# Altium PCB PCB_Alpha.PcbDoc (part 1 of 2)
Units mm, origin at the board's own origin, x right, y up, seen from the top; angles counter-clockwise.
Board outline 114.3 x 137.16 mm, 2 copper layers (Top Layer, Bottom Layer); 181 components, 118 nets, 600 pads, 750 vias.
Unrouted connection lines stored in the file: 4.
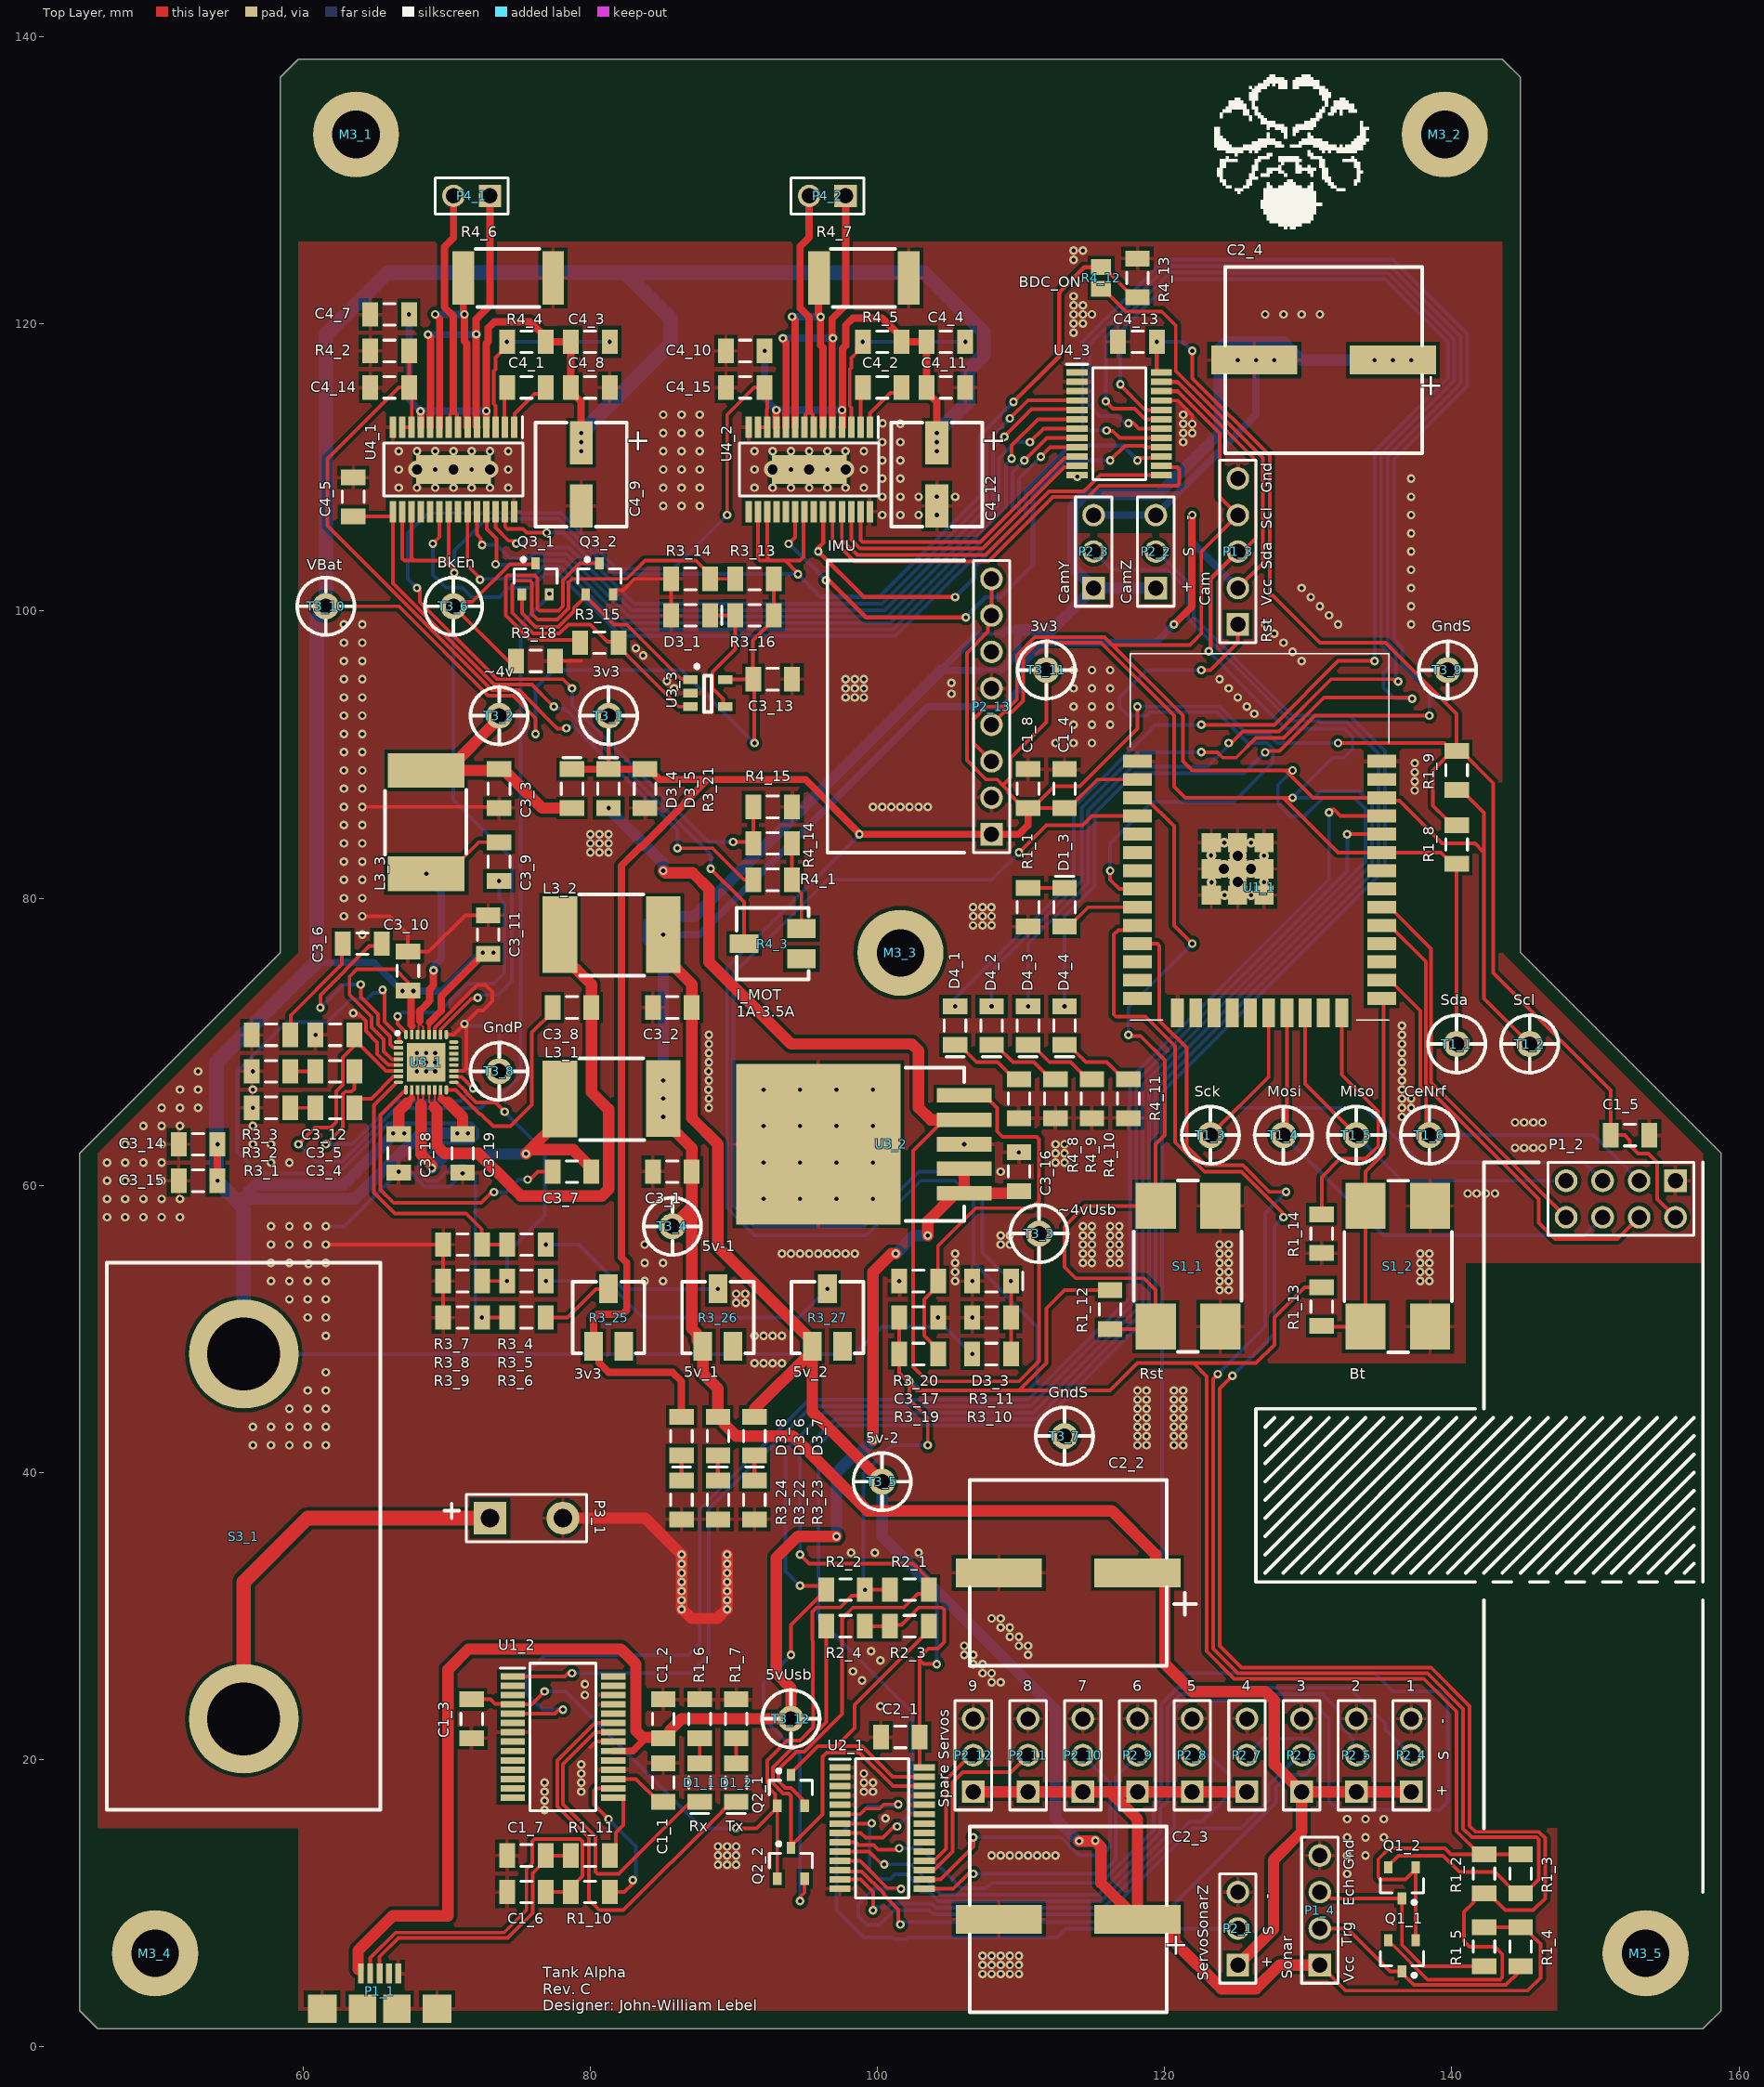
[diagram p0: Top Layer view]
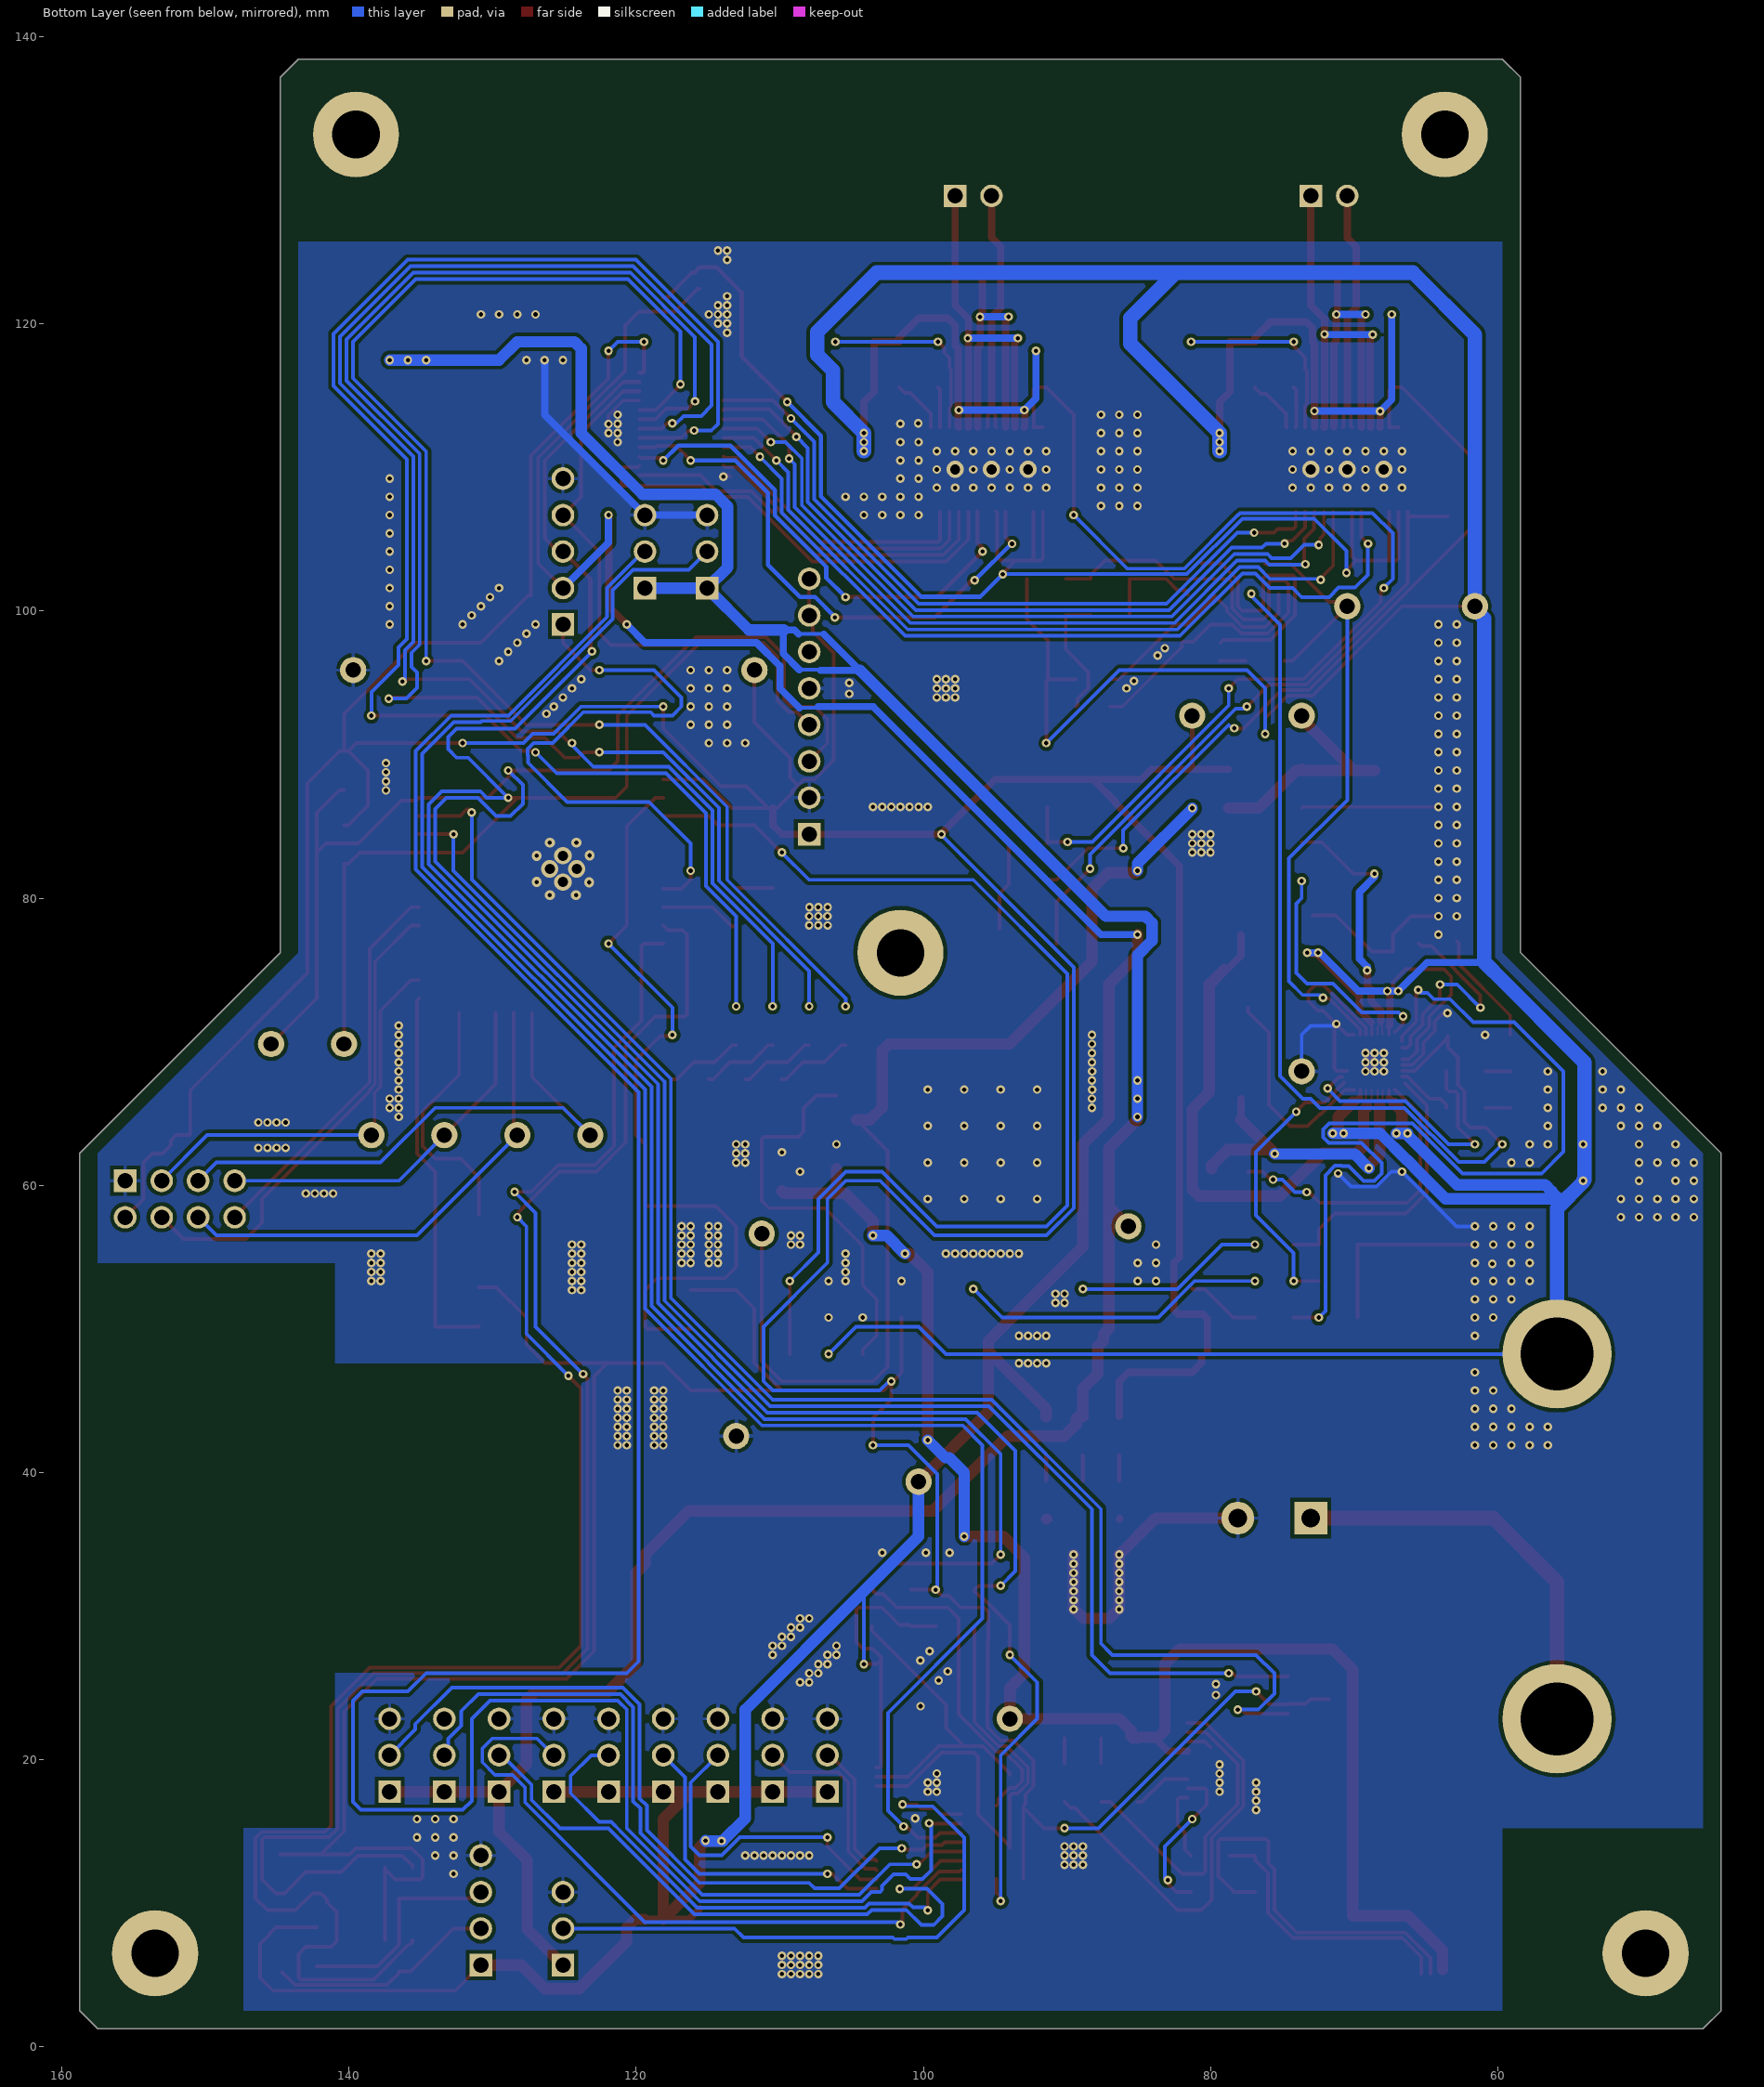
[diagram p1: Bottom Layer view, seen from below]

## Layer stack, top to bottom
Top Solder: solder mask 0.0102, Solder Resist, Dk 3.5
Top Layer: signal copper 0.0356
Dielectric 1: dielectric 0.32, FR-4, Dk 4.8
Bottom Layer: signal copper 0.0356
Bottom Solder: solder mask 0.0102, Solder Resist, Dk 3.5

## Board outline
44.45,2.54 44.45,3.81 44.45,62.23 58.42,76.2 58.42,137.16 59.69,138.43 143.51,138.43 144.78,137.16 144.78,76.2 158.75,62.23 158.75,2.54 157.48,1.27 45.72,1.27

## Design rules (kind name [scope] priority, off if disabled: settings)
Clearance [All] p1: gap=0.254 ignorepadtopadclearanceinfootprint=FALSE except(0: Arc-Hole Track-Hole SMDPad-Via SMDPad-Hole THPad-Hole Via-Hole Fill-Hole Poly-Hole Region-Hole Text-Hole; 0.127: Arc-Arc Arc-Track Arc-SMDPad Arc-Via Track-Track Track-SMDPad Track-Via SMDPad-SMDPad)
HoleSize [All] p1: absolutevalues=TRUE maxlimit=5.08 minlimit=0.025 maxpercent=80.000 minpercent=20.000
MinimumSolderMaskSliver [All] p1: minsoldermaskwidth=0
PlaneConnect [All] p1: pad.planeconnectstyle=Relief pad.reliefexpansion=0.508 pad.reliefentries=4 pad.reliefconductorwidth=0.254 pad.reliefairgap=0.254 via.planeconnectstyle=Direct via.reliefexpansion=0.508 via.reliefentries=4 via.reliefconductorwidth=0.254 via.reliefairgap=0.254
PolygonConnect [All] p1: thpad.connectstyle=Relief thpad.reliefconductorwidth=0.254 thpad.reliefentries=4 thpad.polygonreliefangle="90 Angle" thpad.airgapwidth=0.254 smdpad.connectstyle=Relief smdpad.reliefconductorwidth=0.254 smdpad.reliefentries=4 smdpad.polygonreliefangle="90 Angle" smdpad.airgapwidth=0.254 via.connectstyle=Direct via.reliefconductorwidth=0.254 via.reliefentries=4 via.polygonreliefangle="90 Angle" via.airgapwidth=0.254
RoutingVias [All] p1: holewidth=0.711 width=1.27 viastyle="Through Hole" minholewidth=0.203 minwidth=0.406 maxholewidth=0.711 maxwidth=1.27
SolderMaskExpansion [All] p1: expansion=0.102 istentingtop=FALSE
Width [All] p1: maxlimit=1.016 minlimit=0.127 preferedwidth=0.254 minimp=50.000000 maximp=50.000000 favimp=50.000000
27 further rules are at their usual default settings.

## Classes and differential pairs
component class servo_driver_and_imu_device: C2_1 C2_2 C2_3 C2_4 P2_1 P2_2 P2_3 P2_4 P2_5 P2_6 P2_7 P2_8 P2_9 P2_10 P2_11 P2_12 P2_13 Q2_1 Q2_2 R2_1 R2_2 R2_3 R2_4 U2_1
component class power_supply_and_battery_management: C3_1 C3_2 C3_3 C3_4 C3_5 C3_6 C3_7 C3_8 C3_9 C3_10 C3_11 C3_12 C3_13 C3_14 C3_15 C3_16 C3_17 C3_18 C3_19 D3_1 D3_3 D3_4 D3_5 D3_6 D3_7 D3_8 L3_1 L3_2 L3_3 M3_1 M3_2 M3_3 M3_4 M3_5 P3_1 Q3_1 Q3_2 R3_1 R3_2 R3_3 R3_4 R3_5 R3_6 R3_7 R3_8 R3_9 R3_10 R3_11 R3_13 R3_14 R3_15 R3_16 R3_18 R3_19 R3_20 R3_21 R3_22 R3_23 R3_24 R3_25 R3_26 R3_27 S3_1 T3_1 T3_2 T3_3 T3_4 T3_5 T3_6 T3_7 T3_8 T3_9 T3_10 T3_11 T3_12 U3_1 U3_2 U3_3
component class main_control: C1_1 C1_2 C1_3 C1_4 C1_5 C1_6 C1_7 C1_8 D1_1 D1_2 D1_3 P1_1 P1_2 P1_3 P1_4 Q1_1 Q1_2 R1_1 R1_2 R1_3 R1_4 R1_5 R1_6 R1_7 R1_8 R1_9 R1_10 R1_11 R1_12 R1_13 R1_14 S1_1 S1_2 T1_1 T1_2 T1_3 T1_4 T1_5 T1_6 U1_1 U1_2
component class brushed_motor_drivers: C4_1 C4_2 C4_3 C4_4 C4_5 C4_7 C4_8 C4_9 C4_10 C4_11 C4_12 C4_13 C4_14 C4_15 D4_1 D4_2 D4_3 D4_4 P4_1 P4_2 R4_1 R4_2 R4_3 R4_4 R4_5 R4_6 R4_7 R4_8 R4_9 R4_10 R4_11 R4_12 R4_13 R4_14 R4_15 U4_1 U4_2 U4_3

## Components (designator, comment, footprint, x,y, rotation, side; value= is the part's Value field where it differs from the comment)
C1_1 "12063C104MAT2A" C1206 85.09,18.415 r90 top value=100nF
C1_2 "C1206C103M5RACTU" C1206 85.09,22.86 r90 top value=10nF
C1_3 "12063C104MAT2A" C1206 71.755,22.86 r270 top value=100nF
C1_4 "12063C104MAT2A" C1206 113.03,87.63 r90 top value=100nF
C1_5 "EMK316BJ106MLHT" C1206 152.4,63.5 r0 top value=10µF
C1_6 "CML1206C0G470JT50V" C1206 75.565,10.795 r0 top value=47pF
C1_7 "CML1206C0G470JT50V" C1206 75.565,13.335 r180 top value=47pF
C1_8 "CL31A226KOHNNNE" C1206 110.49,87.63 r90 top value=22µF
C2_1 "12063C104MAT2A" C1206 101.6,21.59 r180 top value=100nF
C2_2 "EMHS250GRA102MKE0S" CAP-ELECTRO-KE0 118.745,33.02 r180 top value=1000µF
C2_3 "EMHS250GRA102MKE0S" CAP-ELECTRO-KE0 118.745,8.89 r180 top value=1000µF
C2_4 "EMHS250GRA102MKE0S" CAP-ELECTRO-KE0 136.525,117.475 r180 top value=1000µF
C3_1 "CL31A226KOHNNNE" C1206 85.725,60.96 r0 top value=22µF
C3_2 "CL31A226KOHNNNE" C1206 85.725,72.39 r0 top value=22µF
C3_3 "CL31A226KOHNNNE" C1206 73.66,87.63 r90 top value=22µF
C3_4 "CML1206X7R472KT50V" C1206 62.23,65.405 r180 top value=4.7nF
C3_5 "CML1206X7R472KT50V" C1206 62.23,67.945 r180 top value=4.7nF
C3_6 "CML1206X7R472KT50V" C1206 64.135,76.835 r0 top value=4.7nF
C3_7 "885012208085" C1206 78.74,60.96 r0 top value=47nF
C3_8 "885012208085" C1206 78.74,72.39 r0 top value=47nF
C3_9 "885012208085" C1206 73.66,82.55 r270 top value=47nF
C3_10 "CM316X5R475K25AT" C1206 67.31,74.93 r270 top value=4.7µF
C3_11 "CM316X5R475K25AT" C1206 72.898,77.47 r270 top value=4.7µF
C3_12 "885382208005" C1206 62.23,70.485 r0 top value=1µF
C3_13 "12063C104MAT2A" C1206 92.71,95.25 r180 top value=100nF
C3_14 "EMK316BJ106MLHT" C1206 52.705,62.865 r0 top value=10µF
C3_15 "12063C104MAT2A" C1206 52.705,60.325 r0 top value=100nF
C3_16 "885382208005" C1206 109.855,60.96 r270 top value=1µF
C3_17 "EMK316BBJ476ML-T" C1206 102.87,50.8 r180 top value="47µF (Ceram.)"
C3_18 "CM316X5R475K25AT" C1206 66.675,62.23 r90 top value=4.7µF
C3_19 "CM316X5R475K25AT" C1206 71.12,62.23 r90 top value=4.7µF
C4_1 "C1206C103M5RACTU" C1206 75.565,115.57 r180 top value=10nF
C4_2 "C1206C103M5RACTU" C1206 100.33,115.57 r180 top value=100nF
C4_3 "12063C104MAT2A" C1206 80.01,118.745 r0 top value=100nF
C4_4 "12063C104MAT2A" C1206 104.775,118.745 r0 top value=100nF
C4_5 "C1206C474M5RECAUTO" C1206 63.5,107.95 r90 top value=470nF
C4_7 "12063C104MAT2A" C1206 66.04,120.65 r180 top value=100nF
C4_8 "12063C104MAT2A" C1206 80.01,115.57 r0 top value=100nF
C4_9 "107AXZ016MQ5" CAP-ELECTRO-530530 79.375,111.715 r270 top value=100µF
C4_10 "12063C104MAT2A" C1206 90.805,118.11 r180 top value=100nF
C4_11 "12063C104MAT2A" C1206 104.775,115.57 r0 top value=100nF
C4_12 "107AXZ016MQ5" CAP-ELECTRO-530530 104.14,111.715 r270 top value=100µF
C4_13 "12063C104MAT2A" C1206 118.11,118.745 r180 top value=100nF
C4_14 "C1206C103M5RACTU" C1206 66.04,115.57 r180 top value=10nF
C4_15 "C1206C103M5RACTU" C1206 90.805,115.57 r180 top value=10nF
D1_1 "LTST-C230KRKT" C1206-POLARIZED 87.63,18.415 r270 top
D1_2 "LTST-C230KRKT" C1206-POLARIZED 90.17,18.415 r270 top
D1_3 "APT3216QBC/D" C1206-POLARIZED 113.03,79.375 r90 top
D3_1 "CZRF52C3V3" C1206-POLARIZED 86.995,99.695 r0 top
D3_3 "CZRF52C3V3" C1206-POLARIZED 107.95,53.34 r0 top
D3_4 "ACDBN160-HF" C1206-POLARIZED 78.74,87.63 r90 top
D3_5 "ACDBN160-HF" C1206-POLARIZED 81.28,87.63 r90 top
D3_6 "APT3216SGC" C1206-POLARIZED 88.9,42.545 r270 top
D3_7 "APT3216SGC" C1206-POLARIZED 91.44,42.545 r270 top
D3_8 "APT3216SGC" C1206-POLARIZED 86.36,42.545 r270 top
D4_1 "APT3216QBC/D" C1206-POLARIZED 105.41,71.12 r270 top
D4_2 "APT3216QBC/D" C1206-POLARIZED 107.95,71.12 r270 top
D4_3 "APT3216QBC/D" C1206-POLARIZED 110.49,71.12 r270 top
D4_4 "APT3216QBC/D" C1206-POLARIZED 113.03,71.12 r270 top
L3_1 "MPXV1D0830L3R3" mpxv1D0830 77.851,66.04 r0 top value=3.3µH
L3_2 "MPXV1D0830L3R3" mpxv1D0830 77.851,77.47 r0 top value=3.3µH
L3_3 "MPXV1D0830L3R3" mpxv1D0830 68.594,88.942 r270 top value=3.3µH
M3_1 "Mounting Hole" MOUNTING-HOLE-M3 63.697,133.185 r0 top locked
M3_2 "Mounting Hole" MOUNTING-HOLE-M3 139.503,133.185 r0 top locked
M3_3 "Mounting Hole" MOUNTING-HOLE-M3 101.6,76.2 r0 top locked
M3_4 "Mounting Hole" MOUNTING-HOLE-M3 49.708,6.528 r0 top locked
M3_5 "Mounting Hole" MOUNTING-HOLE-M3 153.492,6.528 r0 top locked
P1_1 "USB3085-30-A" USB-MICRO-CONNECTOR 65.342,2.667 r0 top
P1_2 "Nrf24L01" HDR2X4-42 155.575,60.325 r180 top
P1_3 "EspCam" HDR1X5-42 125.095,99.06 r90 top
P1_4 "Sonar" HDR1X4-42 130.81,5.715 r90 top
P2_1 "Header 3" HDR1X3-42 125.095,5.715 r90 top
P2_2 "Header 3" HDR1X3-42 119.38,101.6 r90 top
P2_3 "Header 3" HDR1X3-42 115.062,101.6 r90 top
P2_4 "Header 3" HDR1X3-42 137.16,17.78 r90 top
P2_5 "Header 3" HDR1X3-42 133.35,17.78 r90 top
P2_6 "Header 3" HDR1X3-42 129.54,17.78 r90 top
P2_7 "Header 3" HDR1X3-42 125.73,17.78 r90 top
P2_8 "Header 3" HDR1X3-42 121.92,17.78 r90 top
P2_9 "Header 3" HDR1X3-42 118.11,17.78 r90 top
P2_10 "Header 3" HDR1X3-42 114.3,17.78 r90 top
P2_11 "Header 3" HDR1X3-42 110.49,17.78 r90 top
P2_12 "Header 3" HDR1X3-42 106.68,17.78 r90 top
P2_13 "Bno055 port" HDR1X8-42 107.95,84.455 r90 top
P3_1 "1521860000" HDR1X2-508-POLARIZED 73.025,36.83 r0 top
P4_1 "Left Motor Connector" HDR1X2-42 73.025,128.905 r180 top
P4_2 "Right Motor Connector" HDR1X2-42 97.79,128.905 r180 top
Q1_1 "T2N7002AK,LM" SOT23_L 136.525,6.35 r270 top
Q1_2 "T2N7002AK,LM" SOT23_L 136.525,11.43 r270 top
Q2_1 "T2N7002AK,LM" SOT23_L 93.98,17.875 r90 top
Q2_2 "T2N7002AK,LM" SOT23_L 93.98,12.795 r90 top
Q3_1 "RQ5L015SPTL" SOT23_L 76.2,102.235 r90 top
Q3_2 "T2N7002AK,LM" SOT23_L 80.645,102.235 r90 top
R1_1 "Res1" C1206 110.49,79.375 r270 top value=220R
R1_2 "Res1" C1206 142.24,12.065 r270 top value=4K7
R1_3 "Res1" C1206 144.78,12.065 r90 top value=4K7
R1_4 "Res1" C1206 144.78,6.985 r270 top value=4K7
R1_5 "Res1" C1206 142.24,6.985 r90 top value=4K7
R1_6 "Res1" C1206 87.63,22.86 r90 top value=220R
R1_7 "Res1" C1206 90.17,22.86 r90 top value=220R
R1_8 "Res1" C1206 140.335,83.74 r270 top value=4K7
R1_9 "Res1" C1206 140.335,88.9 r270 top value=4K7
R1_10 "Res1" C1206 80.01,10.795 r180 top value=27R
R1_11 "Res1" C1206 80.01,13.335 r180 top value=27R
R1_12 "Res1" C1206 116.205,51.355 r90 top value=4K7
R1_13 "Res1" C1206 130.937,51.562 r270 top value=4K7
R1_14 "Res1" C1206 130.937,56.642 r270 top value=4K7
R2_1 "Res1" C1206 102.235,31.845 r0 top value=4K7
R2_2 "Res1" C1206 97.79,31.845 r0 top value=4K7
R2_3 "Res1" C1206 102.235,29.305 r0 top value=4K7
R2_4 "Res1" C1206 97.79,29.305 r0 top value=4K7
R3_1 "Res1" C1206 57.785,65.405 r180 top value=20K
R3_2 "Res1" C1206 57.785,67.945 r180 top value=20K
R3_3 "Res1" C1206 57.785,70.485 r0 top value=20K
R3_4 "Res1" C1206 75.565,55.88 r0 top value=5K
R3_5 "Res1" C1206 75.565,53.34 r0 top value=5K
R3_6 "Res1" C1206 75.565,50.8 r180 top value=5K
R3_7 "Res1" C1206 71.12,55.88 r0 top value=1K9
R3_8 "Res1" C1206 71.12,53.34 r0 top value=1K9
R3_9 "Res1" C1206 71.12,50.8 r180 top value=3K3
R3_10 "Res1" C1206 107.95,48.26 r180 top value=9K
R3_11 "Res1" C1206 107.95,50.8 r0 top value=3K
R3_13 "Res1" C1206 91.44,102.235 r0 top value=8K6
R3_14 "Res1" C1206 86.995,102.235 r0 top value=5K
R3_15 "Res1" C1206 80.645,97.79 r0 top value=70K
R3_16 "Res1" C1206 91.44,99.695 r0 top value=4K7
R3_18 "Res1" C1206 76.2,96.52 r180 top value=4K7
R3_19 "Res1" C1206 102.87,48.26 r0 top value=1K6
R3_20 "Res1" C1206 102.87,53.34 r180 top value=1K
R3_21 "Res1" C1206 83.82,87.63 r270 top value=220R
R3_22 "Res1" C1206 88.9,38.1 r270 top value=470R
R3_23 "Res1" C1206 91.44,38.1 r270 top value=470R
R3_24 "Res1" C1206 86.36,38.1 r270 top value=330R
R3_25 "ST4ETA103" ST-4ETA103 81.28,50.8 r90 top value=10K
R3_26 "ST4ETA103" ST-4ETA103 88.9,50.8 r90 top value=10K
R3_27 "ST4ETA103" ST-4ETA103 96.52,50.8 r90 top value=10K
R4_1 "Res1" C1206 92.71,81.28 r0 top value=4K3
R4_2 "Res1" C1206 66.04,118.11 r180 top value=4K7
R4_3 "ST32ETB203" ST-32EB 92.71,76.835 r180 top value=20K
R4_4 "Res1" C1206 75.565,118.745 r0 top value=1M
R4_5 "Res1" C1206 100.33,118.745 r0 top value=1M
R4_6 "PCS2512DR1000ET" 2512 74.295,123.19 r0 top value=100m
R4_7 "PCS2512DR1000ET" 2512 99.06,123.19 r0 top value=100m
R4_8 "Res1" C1206 109.855,66.04 r270 top value=470R
R4_9 "Res1" C1206 112.395,66.04 r270 top value=470R
R4_10 "Res1" C1206 114.935,66.04 r270 top value=470R
R4_11 "Res1" C1206 117.475,66.04 r270 top value=470R
R4_12 "Res1" C0805 115.57,123.19 r90 top value=0R
R4_13 "Res1" C1206 118.11,123.19 r90 top value=4K7
R4_14 "Res1" C1206 92.71,83.82 r0 top value=4K3
R4_15 "Res1" C1206 92.71,86.36 r0 top value=4K7
S1_1 "FSM4LPASTR" SW4-SMT 119.38,58.565 r270 top
S1_2 "FSM4LPASTR" SW4-SMT 138.485,50.165 r90 top
S3_1 "S1A" SW2-THR 55.88,48.26 r270 top
T1_1 "Mounting Hole" TESTPOINT 140.335,69.85 r0 top
T1_2 "Mounting Hole" TESTPOINT 145.415,69.85 r0 top
T1_3 "Mounting Hole" TESTPOINT 123.19,63.5 r0 top
T1_4 "Mounting Hole" TESTPOINT 128.27,63.5 r0 top
T1_5 "Mounting Hole" TESTPOINT 133.35,63.5 r0 top
T1_6 "Mounting Hole" TESTPOINT 138.43,63.5 r0 top
T3_1 "Mounting Hole" TESTPOINT 81.28,92.71 r0 top
T3_2 "Mounting Hole" TESTPOINT 73.66,92.71 r0 top
T3_3 "Mounting Hole" TESTPOINT 111.252,56.642 r0 top
T3_4 "Mounting Hole" TESTPOINT 85.725,57.15 r0 top
T3_5 "Mounting Hole" TESTPOINT 100.33,39.37 r0 top
T3_6 "Mounting Hole" TESTPOINT 70.485,100.33 r0 top
T3_7 "Mounting Hole" TESTPOINT 113.03,42.545 r0 top
T3_8 "Mounting Hole" TESTPOINT 73.66,67.945 r0 top
T3_9 "Mounting Hole" TESTPOINT 139.7,95.885 r0 top
T3_10 "Mounting Hole" TESTPOINT 61.595,100.33 r90 top
T3_11 "Mounting Hole" TESTPOINT 111.76,95.885 r0 top
T3_12 "Mounting Hole" TESTPOINT 93.98,22.86 r90 top
U1_1 "ESP32-WROOM-32__16MB_" ESP32WROOM32D16MB 126.61,84.275 r0 top
U1_2 "FT232RL" SOP65P778X200-28N 78.105,21.59 r0 top
U2_1 "Pca9685" SOP65P640X110-28N 100.33,15.24 r0 top
U3_1 "Xr77103-A1r0" "32-TQFN (4x4)" 67.18,70.505 r0 top
U3_2 "Mic37252" "TO-263 (5)" 97.155,62.865 r90 top
U3_3 "TS391SN2T1G" TSOP5(6) 89.595,94.615 r90 top
U4_1 "Drv8829" SOP65P640X120-28N-GROUND_SINK 70.485,109.855 r270 top
U4_2 "Drv8829" SOP65P640X120-28N-GROUND_SINK 95.25,109.855 r270 top
U4_3 "Xra1201" SOP65P640X110-24N 116.84,113.03 r0 top

## Footprints (in the part's own frame and the unit in brackets; to place one, negate y for a bottom-side part, rotate by r counter-clockwise, add the part's x,y. Pads: shape width x height; smd on the part's side, far side on the other; paste and mask are expansions set on the pad)
"32-TQFN (4x4)" [mm]
  oct 0.65x0.25 smd mask+0.07: 1(-0.525,-0.525) 8(-0.525,-3.325) 17(3.325,-3.325) 24(3.325,-0.525)
  rect 0.65x0.25 smd mask+0.07: 2(-0.525,-0.925) 3(-0.525,-1.325) 4(-0.525,-1.725) 5(-0.525,-2.125) 6(-0.525,-2.525) 7(-0.525,-2.925) 18(3.325,-2.925) 19(3.325,-2.525) 20(3.325,-2.125) 21(3.325,-1.725) 22(3.325,-1.325) 23(3.325,-0.925)
  oct 0.25x0.65 smd mask+0.07: 9(0,-3.85) 16(2.8,-3.85) 25(2.8,0) 32(0,0)
  rect 0.25x0.65 smd mask+0.07: 10(0.4,-3.85) 11(0.8,-3.85) 12(1.2,-3.85) 13(1.6,-3.85) 14(2,-3.85) 15(2.4,-3.85) 26(2.4,0) 27(2,0) 28(1.6,0) 29(1.2,0) 30(0.8,0) 31(0.4,0)
  rect 2.7x2.7 smd mask+0.07: 33(1.4,-1.925)
  silkscreen extent -0.7,0 -0.5,0.2
2512 [mm]
  rect 1.5x3.7 smd: 1(-3.125,0) 2(3.125,0)
  silkscreen extent -2.29,-2.03 2.16,2.03
C0805 [mm] "Chip Capacitor, Body 2.0x1.3mm, IPC High Density"
  rect 1.1x1.4 smd: 1(-0.75,0) 2(0.75,0)
  body extent -1.1,-0.72 1.1,0.72, height 1.4
C1206 [mm] "Chip Capacitor, Body 3.2x1.6mm, IPC High Density"
  rect 1.1x1.7 smd: 1(-1.35,0) 2(1.35,0)
  silkscreen extent -0.4,-0.75 0.4,0.75, body extent -1.7,-0.9 1.7,0.9, height 1.3
C1206-POLARIZED [mm] "Chip Capacitor, Body 3.2x1.6mm, IPC High Density"
  rect 1.1x1.7 smd: 1(-1.35,0) 2(1.35,0)
  silkscreen extent -0.4,-0.75 2.16,0.75, body extent -1.7,-0.9 1.7,0.9, height 1.3
CAP-ELECTRO-530530 [mm]
  rect 3x1.6 smd: 1(0,0) 2(4.4,0)
  silkscreen extent -1.4,-3.18 5.84,3.18
CAP-ELECTRO-KE0 [mm]
  rect 6x2 smd: 1(0.635,0) 2(10.287,0)
  silkscreen extent -3.43,-6.48 12.32,6.48
ESP32WROOM32D16MB [mm]
  rect 2x0.9 smd: 1(-8.5,5.26) 2(-8.5,3.99) 3(-8.5,2.72) 4(-8.5,1.45) 5(-8.5,0.18) 6(-8.5,-1.09) 7(-8.5,-2.36) 8(-8.5,-3.63) 9(-8.5,-4.9) 10(-8.5,-6.17) 11(-8.5,-7.44) 12(-8.5,-8.71) 13(-8.5,-9.98) 14(-8.5,-11.25) 25(8.5,-11.25) 26(8.5,-9.98) 27(8.5,-8.71) 28(8.5,-7.44) 29(8.5,-6.17) 30(8.5,-4.9) 31(8.5,-3.63) 32(8.5,-2.36) 33(8.5,-1.09) 34(8.5,0.18) 35(8.5,1.45) 36(8.5,2.72) 37(8.5,3.99) 38(8.5,5.26)
  rect 0.9x2 smd: 15(-5.715,-12.25) 16(-4.445,-12.25) 17(-3.175,-12.25) 18(-1.905,-12.25) 19(-0.635,-12.25) 20(0.635,-12.25) 21(1.905,-12.25) 22(3.175,-12.25) 23(4.445,-12.25) 24(5.715,-12.25)
  rect 1.33x1.33 smd: 39(-3.359,-0.4) 40(-1.524,-0.4) 41(0.311,-0.4) 42(-3.359,-2.235) 43(-1.524,-2.235) 44(0.311,-2.235) 45(-3.359,-4.07) 46(-1.524,-4.07) 47(0.311,-4.07)
  silkscreen extent -9,-12.75 9,12.75, body extent -9,-12.75 9,12.75, height 3.3
HDR1X2-42 [mil] "Connector; Header; 2 Position"
  rect 62x62 hole 42: 1(0,0)
  round 62 hole 42: 2(100,0)
  silkscreen extent -50,-50 150,50
HDR1X2-508-POLARIZED [mil] "Connector; Header; 2 Position"
  rect 90x90 hole 51.18: 1(0,0)
  round 90 hole 51.18: 2(200,0)
  silkscreen extent -125,-65 265,65
HDR1X3-42 [mil] "Connector; Header; 3 Position"
  rect 62x62 hole 42: 1(0,0)
  round 62 hole 42: 2(100,0) 3(200,0)
  silkscreen extent -50,-50 250,50
HDR1X4-42 [mil] "Connector; Header; 4 Position"
  rect 62x62 hole 42: 1(0,0)
  round 62 hole 42: 2(100,0) 3(200,0) 4(300,0)
  silkscreen extent -50,-50 350,50
HDR1X5-42 [mil] "Connector; Header; 5 Position"
  rect 62x62 hole 42: 1(0,0)
  round 62 hole 42: 2(100,0) 3(200,0) 4(300,0) 5(400,0)
  silkscreen extent -50,-50 450,50
HDR1X8-42 [mil] "Connector; Header; 8 Position"
  rect 62x62 hole 42: 1(0,0)
  round 62 hole 42: 2(100,0) 3(200,0) 4(300,0) 5(400,0) 6(500,0) 7(600,0) 8(700,0)
  silkscreen extent -50,-50 750,50
HDR2X4-42 [mil] "Connector; Header; 4x2 Position"
  rect 62x62 hole 42: 1(0,0)
  round 62 hole 42: 2(0,100) 3(100,0) 4(100,100) 5(200,0) 6(200,100) 7(300,0) 8(300,100)
  silkscreen extent -50,-50 350,150
MOUNTING-HOLE-M3 [mm] "Connector; Plug"
  round 6 hole 3.3: 1(0,0)
mpxv1D0830 [mil]
  rect 95x210 smd: 1(1.64,-0.55) 2(285,0)
  silkscreen extent 55,-113 232,110
SOP65P640X110-24N [mm]
  rect 1.475x0.45 smd: 1(-2.938,3.575) 2(-2.938,2.925) 3(-2.938,2.275) 4(-2.938,1.625) 5(-2.938,0.975) 6(-2.938,0.325) 7(-2.938,-0.325) 8(-2.938,-0.975) 9(-2.938,-1.625) 10(-2.938,-2.275) 11(-2.938,-2.925) 12(-2.938,-3.575) 13(2.938,-3.575) 14(2.938,-2.925) 15(2.938,-2.275) 16(2.938,-1.625) 17(2.938,-0.975) 18(2.938,-0.325) 19(2.938,0.325) 20(2.938,0.975) 21(2.938,1.625) 22(2.938,2.275) 23(2.938,2.925) 24(2.938,3.575)
  silkscreen extent -3.67,-3.9 1.85,4.15, body extent -3.2,-3.9 3.2,3.9, height 1.1
SOP65P640X110-28N [mm]
  rect 1.475x0.45 smd: 1(-2.938,4.225) 2(-2.938,3.575) 3(-2.938,2.925) 4(-2.938,2.275) 5(-2.938,1.625) 6(-2.938,0.975) 7(-2.938,0.325) 8(-2.938,-0.325) 9(-2.938,-0.975) 10(-2.938,-1.625) 11(-2.938,-2.275) 12(-2.938,-2.925) 13(-2.938,-3.575) 14(-2.938,-4.225) 15(2.938,-4.225) 16(2.938,-3.575) 17(2.938,-2.925) 18(2.938,-2.275) 19(2.938,-1.625) 20(2.938,-0.975) 21(2.938,-0.325) 22(2.938,0.325) 23(2.938,0.975) 24(2.938,1.625) 25(2.938,2.275) 26(2.938,2.925) 27(2.938,3.575) 28(2.938,4.225)
  silkscreen extent -3.67,-4.85 1.85,4.85, body extent -3.2,-4.85 3.2,4.85, height 1.1
SOP65P640X120-28N-GROUND_SINK [mm]
  rect 1.475x0.45 smd: 1(-2.938,4.225) 2(-2.938,3.575) 3(-2.938,2.925) 4(-2.938,2.275) 5(-2.938,1.625) 6(-2.938,0.975) 7(-2.938,0.325) 8(-2.938,-0.325) 9(-2.938,-0.975) 10(-2.938,-1.625) 11(-2.938,-2.275) 12(-2.938,-2.925) 13(-2.938,-3.575) 14(-2.938,-4.225) 15(2.938,-4.225) 16(2.938,-3.575) 17(2.938,-2.925) 18(2.938,-2.275) 19(2.938,-1.625) 20(2.938,-0.975) 21(2.938,-0.325) 22(2.938,0.325) 23(2.938,0.975) 24(2.938,1.625) 25(2.938,2.275) 26(2.938,2.925) 27(2.938,3.575) 28(2.938,4.225)
  rect 2x5.2 smd: 28(0,0)
  silkscreen extent -3.67,-4.85 1.85,4.85, body extent -3.2,-4.85 3.2,4.85, height 1.2
SOP65P778X200-28N [mm]
  rect 1.7x0.45 smd: 1(-3.5,4.225) 2(-3.5,3.575) 3(-3.5,2.925) 4(-3.5,2.275) 5(-3.5,1.625) 6(-3.5,0.975) 7(-3.5,0.325) 8(-3.5,-0.325) 9(-3.5,-0.975) 10(-3.5,-1.625) 11(-3.5,-2.275) 12(-3.5,-2.925) 13(-3.5,-3.575) 14(-3.5,-4.225) 15(3.5,-4.225) 16(3.5,-3.575) 17(3.5,-2.925) 18(3.5,-2.275) 19(3.5,-1.625) 20(3.5,-0.975) 21(3.5,-0.325) 22(3.5,0.325) 23(3.5,0.975) 24(3.5,1.625) 25(3.5,2.275) 26(3.5,2.925) 27(3.5,3.575) 28(3.5,4.225)
  silkscreen extent -4.35,-5.14 2.3,5.14, body extent -3.89,-5.14 3.89,5.14, height 2
SOT23_L [mm] "SOT23, 3-Leads, Body 2.9x1.3mm, Pitch 0.95mm, Lead Span 2.3mm - Reverse Pinning, IPC High Density"
  rect 0.85x0.6 smd: 1(1.075,0) 2(-1.075,-0.95) 3(-1.075,0.95)
  silkscreen extent -0.3,-1.5 1.47,1.5, body extent -0.7,-1.5 0.7,1.5, height 1.1
ST-4ETA103 [mm] "Square Trimming Potentiometer"
  rect 2x1.3 smd: 1(-2,1.05) 2(-2,-1.05) 3(2,0)
  silkscreen extent -2.5,-2.5 2.5,2.5
ST-32EB [mm] "Square Trimming Potentiometer"
  rect 2x1.3 smd: 1(-2,1.05) 2(-2,-1.05) 3(2,0)
  silkscreen extent -2.5,-2.5 2.5,2.5
SW2-THR [mm]
  round 7.62 hole 5.08: 1(0,0) 2(25.4,0)
  silkscreen extent -6.35,-9.53 31.75,9.53
SW4-SMT [mm]
  rect 3.2x2.8 smd: 1(0,4.5) 1(8.4,4.5) 2(0,0) 2(8.4,0)
  silkscreen extent -1.78,-1.52 10.16,5.97
TESTPOINT [mil] "Connector; Plug"
  round 72 hole 42: 1(0,0)
  silkscreen extent -79,-79 79,79
"TO-263 (5)" [mil]
  rect 40x150 smd mask+4: 1(-134,-350) 2(-67,-350) 3(0,-350) 4(67,-350) 5(134,-350)
  rect 440x450 smd mask+4: 3(0,50)
  silkscreen extent -210,-350 210,-190
TSOP5(6) [mm] "Small Outline; 6 Leads (1 Absent); Body Width 4.4 mm; Pitch 1.27 mm"
  rect 0.6x1 smd: 1(0.61,2.6) 2(-0.33,2.6) 3(-1.27,2.6) 4(-1.27,0.2) 5(0.61,0.2)
  silkscreen extent -1.65,1.14 1.65,2.28
USB-MICRO-CONNECTOR [mm]
  rect 0.4x1.4 smd: 1(-1.3,2.45) 2(-0.65,2.45) 3(0,2.45) 4(0.65,2.45) 5(1.3,2.45)
  rect 2x2 smd: 6(-4,0) 6(4,0)
  rect 1.9x2 smd: 6(-1.2,0) 6(1.2,0)

## Part data
C1_1 C1_2 C1_3 C1_4 C1_5 C1_6 C1_7 C1_8 C2_1 C2_2 C2_3 C2_4 C3_1 C3_2 C3_3 C3_4 C3_5 C3_6 C3_7 C3_8 C3_9 C3_10 C3_11 C3_12 C3_13 C3_14 C3_15 C3_16 C3_17 C3_18 C3_19 C4_1 C4_2 C4_3 C4_4 C4_5 C4_7 C4_8 C4_9 C4_10 C4_11 C4_12 C4_13 C4_14 C4_15: library part Cap, "Capacitor", LatestRevisionDate=17-Jul-2002, LatestRevisionNote="Re-released for DXP Platform.", PackageDescription="Radial Cap, Thru-Hole; 2 Leads; 0.3 in Pin Spacing", PackageReference=RAD-0.3, Published=8-Jun-2000, Publisher="Altium Limited"
D1_1 D1_2 D1_3 D3_6 D3_7 D3_8 D4_1 D4_2 D4_3 D4_4: library part LED0, "Typical INFRARED GaAs LED", LatestRevisionDate=08-Jul-2005, LatestRevisionNote="Mech Layer 1 removed.", PackageDescription="LED; 2 Leads", PackageReference=LED-0, Published=8-Jun-2000, Publisher="Altium Limited"
D3_1 D3_3: library part "D Zener", "Zener Diode", LatestRevisionDate=17-Jul-2002, LatestRevisionNote="Re-released for DXP Platform.", PackageDescription="Diode, Thru-Hole; 2 Leads; 0.7 in Pin Spacing", PackageReference=DIODE-0.7, Published=8-Jun-2000, Publisher="Altium Limited"
D3_4 D3_5: library part Diode, "Default Diode", Code_JEDEC=DO-214-AB, LatestRevisionDate=17-Jul-2002, LatestRevisionNote="Re-released for DXP Platform.", PackageDescription="DO-214-AB/SMC; 2 C-Bend Leads; Body 7.9 x 5.9 mm, inc. leads (LxW)", PackageReference=SMC, PackageVersion=Sep-1996, Published=8-Jun-2000, Publisher="Altium Limited"
L3_1 L3_2 L3_3: library part Inductor, "Inductor", Code_IEC=1005, Code_JEITA=0402, LatestRevisionDate=29-May-2009, LatestRevisionNote="IPC-7351 Footprint Added.", PackageDescription="Chip Inductor", PackageReference=0402-A, Published=8-Jun-2000, Publisher="Altium Limited"
M3_1 M3_2 M3_3 M3_4 M3_5 T1_1 T1_2 T1_3 T1_4 T1_5 T1_6 T3_1 T3_2 T3_3 T3_4 T3_5 T3_6 T3_7 T3_8 T3_9 T3_10 T3_11 T3_12: library part Antenna, "Generic Antenna", LatestRevisionDate=17-Jul-2002, LatestRevisionNote="Re-released for DXP Platform.", PackageReference=PIN1, Published=24-Mar-1999, Publisher="Altium Limited"
P1_1: library part "Usb Connector"
P1_2: library part "Header 4X2", "Header, 4-Pin, Dual row", LatestRevisionDate=17-Jul-2002, LatestRevisionNote="Re-released for DXP Platform.", Publisher="Altium Limited"
P1_3: library part "Header 5", "Header, 5-Pin", LatestRevisionDate=17-Jul-2002, LatestRevisionNote="Re-released for DXP Platform.", Publisher="Altium Limited"
P1_4: library part "Header 4", "Header, 4-Pin", LatestRevisionDate=17-Jul-2002, LatestRevisionNote="Re-released for DXP Platform.", Publisher="Altium Limited"
P2_1 P2_2 P2_3 P2_4 P2_5 P2_6 P2_7 P2_8 P2_9 P2_10 P2_11 P2_12: "Header, 3-Pin", LatestRevisionDate=17-Jul-2002, LatestRevisionNote="Re-released for DXP Platform.", Publisher="Altium Limited"
P2_13: library part "Header 8", "Header, 8-Pin", LatestRevisionDate=17-Jul-2002, LatestRevisionNote="Re-released for DXP Platform.", Publisher="Altium Limited"
P3_1 P4_1 P4_2: library part "Header 2", "Header, 2-Pin", LatestRevisionDate=17-Jul-2002, LatestRevisionNote="Re-released for DXP Platform.", Publisher="Altium Limited"
Q1_1 Q1_2 Q2_1 Q2_2 Q3_2: library part MOSFET-N, "N-Channel MOSFET", LatestRevisionDate=17-Jul-2002, LatestRevisionNote="Re-released for DXP Platform.", PackageDescription="TO, Flat Index; 3 In-Line, Axial Leads; Body Dia. 4.6mm; Lead Dia. 0.5 mm (max)", PackageReference=E3, PackageVersion=1995/1996, Published=8-Jun-2000, Publisher="Altium Limited"
Q3_1: library part MOSFET-P, "P-Channel MOSFET", LatestRevisionDate=17-Jul-2002, LatestRevisionNote="Re-released for DXP Platform.", PackageDescription="TO, Flat Index; 3 In-Line, Axial Leads; Body Dia. 4.6mm; Lead Dia. 0.5 mm (max)", PackageReference=E3, PackageVersion=1995/1996, Published=8-Jun-2000, Publisher="Altium Limited"
R1_1 R1_2 R1_3 R1_4 R1_5 R1_6 R1_7 R1_8 R1_9 R1_10 R1_11 R1_12 R1_13 R1_14 R2_1 R2_2 R2_3 R2_4 R3_1 R3_2 R3_3 R3_4 R3_5 R3_6 R3_7 R3_8 R3_9 R3_10 R3_11 R3_13 R3_14 R3_15 R3_16 R3_18 R3_19 R3_20 R3_21 R3_22 R3_23 R3_24 R4_1 R4_2 R4_4 R4_5 R4_8 R4_9 R4_10 R4_11 R4_12 R4_13 R4_14 R4_15: "Resistor", LatestRevisionDate=17-Jul-2002, LatestRevisionNote="Re-released for DXP Platform.", PackageDescription="Axial Device, Thru-Hole; 2 Leads; 0.3 in Pin Spacing", PackageReference=AXIAL-0.3, Published=8-Jun-2000, Publisher="Altium Limited"
R3_25 R3_26 R3_27 R4_3: library part RPot, "Potentiometer", LatestRevisionDate=17-Jul-2002, LatestRevisionNote="Re-released for DXP Platform.", PackageDescription="Variable Resistor, Thru-Hole; 3 Leads", PackageReference=VR5, Published=8-Jun-2000, Publisher="Altium Limited", Set Position=0.5, Sim Note="Enter the Resistance value and the set point into parameter fields."
R4_6 R4_7: library part Res1, "Resistor", LatestRevisionDate=17-Jul-2002, LatestRevisionNote="Re-released for DXP Platform.", PackageDescription="Axial Device, Thru-Hole; 2 Leads; 0.3 in Pin Spacing", PackageReference=AXIAL-0.3, Published=8-Jun-2000, Publisher="Altium Limited"
S1_1 S1_2: library part SW-PB, "Switch", LatestRevisionDate=17-Jul-2002, LatestRevisionNote="Re-released for DXP Platform.", PackageDescription="Switch; 2 Leads", PackageReference=SPST-2, Published=24-Mar-1999, Publisher="Altium Limited"
S3_1: library part SW-SPST, "Single-Pole, Single-Throw Switch", LatestRevisionDate=17-Jul-2002, LatestRevisionNote="Re-released for DXP Platform.", PackageDescription="Switch; 2 Leads", PackageReference=SPST-2, Published=24-Mar-1999, Publisher="Altium Limited"
U1_1: "Integrated Circuit", Manufacturer_Name="Espressif Systems", Manufacturer_Part_Number="ESP32-WROOM-32 (16MB)", Mouser Part Number=356-ESPWROOM3216MB, Datasheet Link=https://www.espressif.com/sites/default/files/documentation/esp32_datasheet_en.pdf, Height=3.2mm, Mouser Price/Stock=https://www.mouser.co.uk/ProductDetail/Espressif-Systems/ESP32-WROOM-32-16MB?qs=w%2Fv1CP2dgqrcPyEPuQvO1A%3D%3D
U1_2: library part Ft232
U2_1: "Serial pwm led driver"
U3_1: "Dc to dc step down converter"
U3_3: library part "Op Amp"

## Via types
v1: diameter 0.6, hole 0.3, Top Layer to Bottom Layer, 732 vias
v2: diameter 1.2, hole 0.7, Top Layer to Bottom Layer, 10 vias
v3: diameter 0.7, hole 0.3, Top Layer to Bottom Layer, 8 vias

## Nets (pads, with @x,y where several pads share a name; then routed paths per layer and width w, separated by ;. In a path a pad name is that pad's centre, name@x,y a point inside that pad or via, vN(x,y) a via of type N, cw(c..) or ccw(c..) an arc to the next point about the centre after c; other vN are vias at no path point)
3v3: C1_3.1 C1_4.1 C1_5.1 C1_8.1 C3_17.2 C4_13.1 D3_4.2 D3_5.2 D3_8.1 P1_2.2 P2_13.1 P2_13.7 P2_13.8 Q1_1.3 Q1_2.3 Q2_1.3 Q2_2.3 R1_2.1 R1_3.2 R1_8.1 R1_9.1 R1_12.2 R1_13.1 R2_1.1 R2_2.2 R3_19.1 R3_21.1 R3_25.1 T3_1.1 T3_11.1 U1_1.2 U1_2.4 U4_3.24 | length 518.9
  Top Layer w0.254: C1_3.1@71.755,24.21 73.057,24.21 73.374,23.893 74.577,23.893 U1_2.4@74.605,23.865 75.935,23.865 v1(76.835,24.765) ; R3_25.1@80.23,48.45 R3_25.1@80.626,48.054 ; v1(90.17,15.24) 91.595,15.24 Q2_1.3@93.03,16.675 ; Q2_2.3@93.03,11.72 Q2_1.3@93.03,16.675 ; R2_1.1@100.885,31.845 v1(99.14,31.845) 98.724,31.429 98.231,31.429 97.409,30.607 95.758,30.607 95.462,30.311 95.525,22.354 cw(c95.271,22.351) 95.451,22.172 94.615,21.336 93.726,21.336 92.329,19.939 92.329,18.158 92.881,17.606 92.881,16.949 Q2_1.3@93.03,16.8 Q2_1.3@93.03,16.675 ; C3_17.2@101.52,50.8 R3_19.1@101.52,48.26 101.52,46.943 v1@102.235,46.228 ; v1(102.235,46.355) v1@102.235,46.228 ; v1(103.505,41.91) 103.505,43.815 102.235,45.085 v1@102.235,46.228 ; P2_13.8@107.95,102.235 P2_13.7@107.95,99.695 107.697,99.442 107.697,98.555 106.229,97.087 106.229,89.603 107.568,88.265 108.332,88.265 108.725,87.872 ; T3_11.1@111.76,95.885 111.76,92.253 109.271,89.764 109.271,88.417 108.725,87.872 ; R1_12.2@116.205,52.705 113.03,52.705 111.76,51.435 111.76,47.625 109.855,45.72 ; U1_1.2@118.11,88.265 115.315,88.265 113.33,86.28 C1_4.1@113.03,86.28 C1_8.1@110.79,86.28 ; v1(118.11,93.345) 118.11,91.818 114.094,87.802 112.312,87.802 C1_8.1@110.79,86.28 ; v1(121.92,118.11) 121.92,116.205 127.315,110.81 127.315,101.077 127.523,101.077 130.81,97.79 135.382,97.79 140.335,92.837 R1_9.1@140.335,90.25 ; R1_13.1@130.937,52.912 129.747,52.912 127.635,50.8 127.635,48.895 126.365,47.625 122.006,47.625 ; v1(132.08,90.805) 139.48,90.805 R1_9.1@140.035,90.25 ; Q1_1.3@137.475,7.425 Q1_2.3@137.475,12.38 ; Q1_2.3@137.475,12.505 Q1_2.3@137.475,12.38 ; R1_8.1@140.335,85.09 140.035,85.09 139.612,85.513 139.612,85.521 138.684,86.449 138.684,88.899 R1_9.1@140.035,90.25 ; R1_3.2@144.78,13.415 R1_2.1@142.24,13.415 R1_2.1@141.94,13.415 ; P1_2.2@155.575,57.785 154.305,59.055 154.305,61.595 153.67,62.23 152.959,62.23 152.4,62.789 152.4,63.119 152.019,63.5 C1_5.1@151.05,63.5 151.05,66.628 142.875,74.803 142.875,88.01 140.635,90.25 R1_9.1@140.335,90.25 ; v1@102.235,46.228 102.743,45.72 109.855,45.72 ; 108.725,87.872 109.118,87.479 109.118,87.352 110.19,86.28 C1_8.1@110.49,86.28 C1_8.1@110.79,86.28 ; 109.855,45.72 116.205,45.72 118.11,47.625 122.006,47.625 ; 122.006,47.625 122.923,46.707 122.923,27.567 124.836,25.654 138.046,25.654 140.335,23.365 140.335,15.02 R1_2.1@141.94,13.415 ; Q1_2.3@137.475,12.38 136.779,11.684 135.023,11.684 134.874,11.833 134.874,13.081 135.636,13.843 139.519,13.843 139.947,13.415 R1_2.1@141.94,13.415 ; R1_9.1@140.035,90.25 R1_9.1@140.335,90.25
  Top Layer w0.3: D3_5.2@81.28,88.98 T3_1.1@81.28,92.71 ; R3_21.1@83.82,88.98 R3_21.1@84.12,88.98 ; v1(98.742,84.455) v1@98.742,84.519 ; v1(119.46,118.745) 119.46,116.68 119.535,116.605 U4_3.24@119.778,116.605
  Top Layer w0.508: D3_4.2@78.74,88.98 D3_5.2@81.28,88.98 R3_21.1@83.82,88.98 ; R3_25.1@80.23,48.45 80.23,50.731 80.528,51.029 82.252,51.029 82.55,51.326 82.55,54.61 82.169,54.991 82.169,82.255 83.481,83.567 83.567,83.567 86.613,86.613 86.613,86.699 88.179,88.265 ; R3_25.1@80.626,48.054 80.626,47.644 81.28,46.99 85.725,46.99 86.36,46.355 D3_8.1@86.36,43.895 ; R3_21.1@84.12,88.98 84.835,88.265 88.179,88.265 ; v1(98.742,84.455) P2_13.1@107.95,84.455 109.855,84.455 110.49,85.09 C1_8.1@110.49,86.28 ; v1@98.742,84.519 94.996,88.265 88.179,88.265
  Bottom Layer w0.254: v1(76.835,24.765) 78.272,24.765 87.797,15.24 v1(90.17,15.24) ; v1(98.742,84.455) 98.742,84.391 89.535,75.184 89.535,58.42 91.44,56.515 99.211,56.515 103.021,60.325 105.407,60.325 106.679,59.054 106.679,57.786 106.68,57.785 106.68,54.61 111.125,50.165 111.125,46.355 110.49,45.72 103.037,45.72 102.402,46.355 v1(102.235,46.355) ; v1(99.14,31.845) 99.035,31.95 99.035,39.907 101.038,41.91 v1(103.505,41.91) ; v1(118.11,93.345) 123.825,93.345 125.73,91.44 127.21,91.44 127.845,90.805 v1(132.08,90.805) ; v1(119.46,118.745) 121.285,118.745 v1(121.92,118.11)
4v: C3_3.2 D3_4.1 L3_3.1 T3_2.1 | length 16.7
  Top Layer w0.8: L3_3.1@68.58,88.9 L3_3.1@70.04,88.9 ; C3_3.2@73.66,88.98 C3_3.2@73.58,88.9 ; T3_2.1@73.66,92.71 73.66,92.519 L3_3.1@70.04,88.9 ; D3_4.1@78.74,86.28 76.66,86.28 74.04,88.9 C3_3.2@73.58,88.9 ; L3_3.1@70.04,88.9 C3_3.2@73.58,88.9
5v-1: C2_2.1 C2_4.1 C3_1.2 D3_6.1 L3_1.2 P2_1.1 P2_2.1 P2_3.1 P2_4.1 P2_5.1 P2_6.1 R3_26.1 T3_4.1 | length 209
  Top Layer w0.8: v1(85.09,64.77) 85.09,64.579 87.075,62.595 C3_1.2@87.075,60.96 87.075,58.5 ; T3_4.1@85.725,57.15 87.075,58.5 ; P2_1.1@125.095,5.715 127.584,8.204 127.584,13.03 129.54,14.986 P2_6.1@129.54,17.78 ; P2_4.1@137.16,17.78 P2_5.1@133.35,17.78 P2_6.1@129.54,17.78 ; 87.075,58.5 87.075,50.028 87.454,49.649 87.454,49.196 R3_26.1@87.85,48.8 87.85,46.897 88.9,45.847 D3_6.1@88.9,43.895 89.2,43.895 89.35,43.745 89.35,43.365 90.17,42.545 94.107,42.545 99.314,37.338 116.332,37.338 119.38,34.29 119.38,33.655 120.015,33.02 120.015,26.67 121.92,24.765 127,24.765 127.635,24.13 127.635,19.685 P2_6.1@129.54,17.78
  Bottom Layer w0.254: 106.937,98.394 108.687,98.394 ; 107.352,95.922 108.647,95.922
  Bottom Layer w0.508: 106.937,98.394 104.411,95.868 107.164,95.868 ; 108.647,95.922 109.753,97.028 109.753,98.679 ; 108.687,98.394 108.972,98.679 109.728,98.679
  Bottom Layer w0.8: v1(85.09,64.77) v1(85.09,66.04) v1(85.09,67.31) 85.09,76.033 84.074,77.049 84.074,78.271 84.543,78.74 87.284,78.74 104.411,95.868 ; 109.728,98.679 112.141,98.679 P2_3.1@115.062,101.6 ; P2_2.1@119.38,101.6 P2_3.1@115.062,101.6 ; v1(137.16,117.475) v1(135.89,117.475) v1(134.62,117.475) 129.54,117.475 128.27,118.745 124.294,118.745 123.825,118.276 123.825,112.395 119.551,108.121 114.465,108.121 113.621,107.277 113.621,103.041 P2_3.1@115.062,101.6
5v-2: C2_1.1 C2_3.1 C3_2.2 D3_7.1 L3_2.2 P1_3.2 P1_4.1 P2_7.1 P2_8.1 P2_9.1 P2_10.1 P2_11.1 P2_12.1 R1_4.1 R1_5.2 R2_3.1 R2_4.2 R3_27.1 R4_12.1 T3_5.1 U2_1.28 | length 273.8
  Top Layer w0.254: R2_4.2@99.14,29.305 R2_3.1@100.885,29.305 100.984,29.404 101.667,29.404 102.87,30.607 104.499,30.607 104.648,30.458 104.648,28.194 104.204,27.75 103.55,27.75 102.95,27.15 102.95,26.94 ; U2_1.28@103.268,19.465 103.048,19.465 102.95,19.563 C2_1.1@102.95,21.59 102.95,26.94 ; v1(104.14,26.67) 103.22,26.67 102.95,26.94 ; R4_12.1@115.57,122.44 115.72,122.44 117.301,120.859 119.806,120.859 120.776,119.889 120.776,116.712 122.891,114.597 126.825,110.662 126.825,103.33 P1_3.2@125.095,101.6 ; P1_4.1@130.81,5.715 132.596,3.929 145.28,3.929 146.177,4.826 146.177,7.167 145.503,7.841 145.503,7.912 145.08,8.335 R1_4.1@144.78,8.335 R1_5.2@142.24,8.335
  Top Layer w0.508: v1@115.149,14.351 v1(115.169,14.371) ; C2_3.1@115.57,9.636 116.316,8.89 C2_3.1@118.11,8.89 C2_3.1@119.42,8.89 ; v1(120.65,99.06) 121.895,100.305 121.895,106.59 121.902,106.597 121.902,106.662 v1(121.92,106.68)
  Top Layer w0.8: v1(85.09,77.47) 85.09,76.01 87.075,74.025 C3_2.2@87.075,72.39 87.075,64.69 88.9,62.865 88.9,55.72 95.47,49.15 R3_27.1@95.47,48.8 R3_27.1@95.47,48.45 ; D3_7.1@91.44,43.895 91.44,44.42 R3_27.1@95.47,48.45 ; T3_5.1@100.33,39.37 95.47,44.23 R3_27.1@95.47,48.45 ; P2_12.1@106.68,17.78 P2_11.1@110.49,17.78 P2_10.1@114.3,17.78 116.205,17.78 ; v1(114.046,14.351) 115.149,14.351 115.57,13.93 115.57,11.43 C2_3.1@118.11,8.89 118.11,15.875 116.205,17.78 ; C2_3.1@119.42,8.89 120.067,8.89 120.667,8.29 120.667,7.349 123.952,4.064 126.365,4.064 128.016,5.715 P1_4.1@130.81,5.715 ; P2_7.1@125.73,17.78 P2_8.1@121.92,17.78 P2_9.1@118.11,17.78 116.205,17.78
  Bottom Layer w0.254: v1(104.14,26.67) 104.14,31.75 ; 107.315,93.345 107.41,93.25 108.617,93.25
  Bottom Layer w0.508: v1(85.09,77.47) 87.63,77.47 103.505,93.345 107.315,93.345 ; 108.617,93.25 109.982,94.615 109.982,96.164 111.608,97.79 119.38,97.79 v1(120.65,99.06) ; v1(121.92,106.68) 121.92,104.775 P1_3.2@125.095,101.6
  Bottom Layer w0.8: T3_5.1@100.33,39.37 100.33,35.56 104.14,31.75 112.395,23.495 112.395,15.923 113.967,14.351 115.149,14.351 v1(115.169,14.371)
5vProgUsb: C1_2.1 C3_16.2 P1_1.1 T3_12.1 U1_2.20 U3_2.1 U3_2.2 | length 109.1
  Top Layer w0.508: U1_2.20@81.605,20.615 82.972,20.615 83.654,21.297
  Top Layer w0.8: 63.842,5.417 63.842,6.722 66.264,9.144 70.104,9.144 70.104,26.289 71.526,27.711 82.144,27.711 83.185,26.67 83.185,22.039 83.654,21.571 85.029,21.571 C1_2.1@85.09,21.51 ; C1_2.1@85.39,21.51 85.54,21.66 85.54,22.04 86.36,22.86 T3_12.1@93.98,22.86 93.98,24.998 92.964,26.014 92.964,34.076 94.448,35.56 v1(97.155,35.56) ; v1(99.695,42.266) 99.695,53.975 100.965,55.245 v1(101.282,55.245) ; v1(103.505,56.515) 103.505,57.509 105.457,59.461 U3_2.1@106.045,59.461 ; U3_2.2@106.045,61.163 U3_2.1@106.045,59.461 ; C3_16.2@109.855,59.61 109.706,59.461 U3_2.1@106.045,59.461
  Bottom Layer w0.8: v1(97.155,35.56) 97.155,40.005 98.188,41.038 98.467,41.038 v1(99.695,42.266) ; v1(101.282,55.245) 102.552,56.515 v1(103.505,56.515)
5vVccBuckLogic: C3_12.2 Q3_1.2 U3_1.6 | length 66.7
  Top Layer w0.254: v1(59.69,62.865) 60.848,64.023 61.944,64.023 62.325,64.404 62.325,66.547 62.776,66.998 62.776,68.9 63.5,69.624 C3_12.2@63.5,70.265 ; C3_12.2@63.5,70.405 C3_12.2@63.5,70.265 ; U3_1.6@66.655,67.98 65.785,67.98 C3_12.2@63.5,70.265
  Bottom Layer w0.254: v1(59.69,62.865) 60.924,61.631 62.722,61.631 66.487,65.396 72.381,65.396 73.025,66.04 73.587,66.04 75.154,67.607 75.154,99.055 77.165,101.067 v1(77.165,101.194)
Battery: C3_10.2 C3_11.2 C3_13.2 C3_14.2 C3_15.2 C3_18.2 C3_19.2 C4_3.1 C4_4.1 C4_7.1 C4_8.1 C4_9.1 C4_10.1 C4_11.1 C4_12.1 R3_10.2 R3_13.2 R3_16.2 R4_4.2 R4_5.2 S3_1.1 T3_10.1 U3_1.4 U3_1.10 U3_1.15 U3_1.28 U3_1.31 U3_3.5 U4_1.4 U4_1.11 U4_2.4 U4_2.11 | length 403.3
  Top Layer w0.254: T3_10.1@61.595,100.33 66.675,100.33 72.898,94.107 74.63,94.107 76.2,92.537 v1(76.2,91.44) ; U3_1.4@66.655,68.78 66.189,68.78 65.625,69.344 65.625,70.171 64.781,71.015 64.781,71.744 63.246,73.279 63.246,74.549 63.754,75.057 66.421,75.057 67.31,74.168 C3_10.2@67.31,73.58 ; 67.58,66.066 U3_1.10@67.58,66.655 ; U3_1.31@67.58,70.505 67.58,71.094 67.585,71.099 ; U3_1.28@68.78,70.505 68.78,71.247 ; U3_1.15@69.58,66.655 69.582,66.653 69.582,66.127 69.637,66.072 ; U3_3.5@89.395,95.225 91.335,95.225 91.335,97.94 92.79,99.395 R3_16.2@92.79,99.695 R3_13.2@92.79,102.235 ; C3_13.2@91.36,95.25 91.44,95.17 v1(91.44,90.805) ; C4_10.1@92.155,117.81 v1(92.155,118.11)
  Top Layer w0.508: S3_1.1@53.975,50.165 S3_1.1@55.88,48.26 ; C3_15.2@53.975,60.245 v1(54.055,60.325) v1(54.055,62.865) ; 67.241,65.728 67.58,66.066 ; C3_10.2@67.31,73.58 67.314,73.58 67.552,73.342 67.518,73.309 67.518,71.165 67.585,71.099 ; v1(68.199,113.919) 68.199,112.804 U4_1.11@68.21,112.793 ; 68.822,71.35 69.624,72.153 69.624,73.146 72.598,76.12 C3_11.2@72.898,76.12 ; 69.637,66.072 70.14,65.568 ; C3_19.2@71.114,63.586 C3_19.2@71.12,63.58 ; U4_1.4@72.76,112.793 v1@72.76,113.931 ; v1@72.76,113.939 v1(72.768,113.931) 72.768,118.615 72.898,118.745 72.898,119.71 73.33,120.142 75.818,120.142 76.915,119.045 R4_4.2@76.915,118.745 C4_3.1@78.66,118.745 C4_8.1@78.66,115.57 78.66,115.27 79.375,114.555 v1(79.375,112.395) v1(79.375,111.76) ; v1(92.964,113.995) 92.931,113.962 92.931,112.837 U4_2.11@92.975,112.793 ; U4_2.4@97.525,112.793 97.567,112.835 97.567,113.828 97.543,113.853 97.543,113.911 97.567,113.935 97.567,118.268 97.79,118.491 97.79,119.888 98.298,120.396 100.329,120.396 101.68,119.045 R4_5.2@101.68,118.745 C4_4.1@103.425,118.745 C4_11.1@103.425,115.57 103.425,115.27 104.14,114.555 v1(104.14,112.395) v1(104.14,111.76)
  Top Layer w0.8: C3_18.2@66.675,63.58 66.675,65.161 67.241,65.728 ; 70.095,65.803 70.095,65.795 71.12,64.77 C3_19.2@71.12,63.58
  Bottom Layer w0.254: S3_1.1@55.88,48.26 98.425,48.26 100.33,50.165 104.695,50.165 v1(106.6,48.26) ; 60.325,74.93 60.399,75.004 ; v1(76.2,91.44) 76.2,94.615 77.47,95.885 86.36,95.885 v1(91.44,90.805)
  Bottom Layer w0.508: 55.88,59.055 55.88,59.183 ; 60.784,75.529 60.924,75.529 64.933,75.529 v1(66.929,73.533) v1(67.691,73.533) 69.723,73.533 72.39,76.2 v1(72.517,76.2) v1(73.279,76.2) ; v1(67.39,120.65) 67.39,114.728 v1(68.199,113.919) 72.756,113.919 v1(72.768,113.931) ; v1(92.155,118.11) 92.155,114.804 v1(92.964,113.995) v1(97.536,113.995)
  Bottom Layer w0.8: 55.88,59.055 63.627,59.055 65.848,61.276 65.848,61.303 66.332,61.787 66.359,61.787 68.199,63.627 v1(70.739,63.627) v1(71.501,63.627) ; 55.88,59.183 56.236,59.539 56.236,59.577 56.704,60.046 62.84,60.046 66.294,63.5 v1(66.294,63.627) v1(67.056,63.627)
  Bottom Layer w1.016: S3_1.1@55.88,48.26 55.88,58.42 54.055,60.245 v1(54.055,60.325) 53.975,60.405 53.975,68.58 60.325,74.93 ; 60.399,75.004 60.924,75.529 60.96,75.565 60.96,99.475 61.595,100.11 T3_10.1@61.595,100.33 61.595,119.253 65.913,123.571 82.423,123.571 ; v1(79.375,111.125) v1(79.375,111.76) v1(79.375,112.395) 85.598,118.618 85.598,120.396 82.423,123.571 ; v1(104.14,111.125) v1(104.14,111.76) v1(104.14,112.395) 106.299,114.554 106.299,116.742 107.395,117.838 107.395,119.427 103.251,123.571 82.423,123.571
BatteryLevel: D3_3.2 R3_10.1 R3_11.2 U1_1.4 | length 80.7
  Top Layer w0.254: R3_10.1@109.3,48.26 R3_11.2@109.3,50.8 v1(109.3,53.34) ; v1(109.855,83.185) 111.76,85.09 114.3,85.09 114.935,85.725 U1_1.4@118.11,85.725
  Bottom Layer w0.254: v1(109.3,53.34) 107.315,55.325 107.315,59.055 105.41,60.96 102.87,60.96 99.061,57.151 91.441,57.151 89.986,58.607 89.986,74.743 96.523,81.28 107.95,81.28 v1(109.855,83.185)
bdcEnable: R4_12.2 R4_13.1 U4_1.16 U4_1.17 U4_1.21 U4_2.16 U4_2.17 U4_2.21 | length 96.8
  Top Layer w0.254: U4_1.16@66.91,106.917 66.91,103.654 67.059,103.505 67.757,103.505 ; U4_1.17@67.56,106.917 67.56,103.702 67.757,103.505 ; U4_1.21@70.16,106.917 70.16,103.815 69.85,103.505 ; v1(70.537,102.664) 70.537,102.818 69.85,103.505 ; U4_2.16@91.675,106.917 91.675,103.654 91.824,103.505 92.547,103.505 ; U4_2.17@92.325,106.917 92.325,103.727 92.547,103.505 ; v1(94.468,102.568) 94.468,102.618 93.581,103.505 ; U4_2.21@94.925,106.917 94.869,106.861 94.869,103.759 94.615,103.505 93.581,103.505 ; R4_12.2@116.148,123.54 R4_13.1@117.41,122.278 ; 67.757,103.505 69.85,103.505 ; 92.547,103.505 93.581,103.505
  Top Layer w0.3: v1(109.474,114.554) 112.649,117.729 112.649,122.174 114.403,123.928 115.558,123.928 R4_12.2@115.57,123.94 115.97,123.54 R4_12.2@116.148,123.54 ; R4_13.1@117.41,122.278 117.41,122.24 117.81,121.84 R4_13.1@118.11,121.84
  Bottom Layer w0.254: v1(70.537,102.664) 70.537,104.187 72.786,106.436 77.788,106.436 81.656,102.568 v1(94.468,102.568)
  Bottom Layer w0.3: v1(94.468,102.568) 96.045,100.991 100.141,100.991 107.127,107.977 107.127,112.207 v1(109.474,114.554)
BuckEnable: Q3_1.1 R3_18.2 T3_6.1 U3_1.26 | length 47.4
  Top Layer w0.254: U3_1.26@69.58,70.505 69.582,70.507 69.582,70.854 71.731,73.003 72.112,73.003 v1(72.179,73.069) ; R3_18.2@74.85,96.52 74.295,96.52 T3_6.1@70.485,100.33 70.78,100.625 71.78,100.625 74.407,103.251 76.141,103.251 Q3_1.1@76.2,103.31
  Bottom Layer w0.254: T3_6.1@70.485,100.33 70.485,86.838 74.549,82.774 74.549,74.212 73.599,73.261 72.37,73.261 v1(72.179,73.069)
CameraServoY: P2_3.2 U2_1.8 | length 133.5
  Top Layer w0.254: U2_1.8@97.392,14.915 98.842,14.915 99.183,14.574 100.383,14.574 101.168,15.359 v1(101.369,15.359)
  Bottom Layer w0.254: v1(101.369,15.359) 102.466,16.456 102.466,23.264 95.885,29.845 95.885,41.91 97.257,43.282 111.24,43.282 119.38,51.422 119.38,66.678 134.887,82.184 134.887,90.073 132.688,92.272 130.822,92.272 130.752,92.342 129.236,92.342 128.734,92.342 121.646,99.43 121.646,99.931 121.646,101.447 120.224,102.87 116.332,102.87 P2_3.2@115.062,104.14
CameraServoZ: P2_2.2 U2_1.7 | length 185.3
  Top Layer w0.254: U2_1.7@97.392,15.565 99.579,15.565 v1(99.604,15.59)
  Bottom Layer w0.254: v1(99.604,15.59) 99.462,15.448 99.462,12.302 100.057,11.707 100.898,11.707 101.225,12.033 102.066,12.033 102.87,11.23 102.87,10.944 103.019,10.795 103.627,10.795 104.274,10.147 115.57,10.147 120.65,15.227 120.65,23.495 121.285,24.13 130.175,24.13 131.445,22.86 131.445,17.145 132.08,16.51 139.151,16.51 139.7,17.059 139.7,24.13 139.065,24.765 135.89,24.765 134.62,26.035 120.65,26.035 119.831,26.854 119.831,66.491 135.338,81.998 135.338,90.259 132.874,92.723 128.892,92.723 122.027,99.588 122.027,101.605 119.492,104.14 P2_2.2@119.38,104.14
DriverCurrentControl: R4_1.2 R4_3.2 R4_14.2 | length 6.2
  Top Layer w0.254: R4_14.2@94.06,83.82 R4_1.2@94.06,81.28 94.06,80.98 94.71,80.33 R4_3.2@94.71,77.885
EspCamRst: P1_3.1 U1_1.8 | length 43.2
  Top Layer w0.254: v1(116.205,81.915) 116.205,81.28 116.84,80.645 U1_1.8@118.11,80.645 ; v1(122.555,95.885) 123.19,95.885 125.095,97.79 P1_3.1@125.095,99.06
  Bottom Layer w0.254: v1(116.205,81.915) 116.205,83.82 119.096,86.711 124.811,86.711 127.53,89.43 127.53,89.897 127.554,89.921 127.554,90.388 127.137,90.805 125.816,90.805 123.664,92.957 118.992,92.957 118.745,92.71 117.475,92.71 116.84,93.345 116.84,93.98 118.745,95.885 v1(122.555,95.885)